# Altium PCB Posture_corrector_pcb_design.PcbDoc
Units mm, origin at the board's own origin, x right, y up, seen from the top; angles counter-clockwise.
Board outline 77.6 x 86.49 mm, 2 copper layers (Top Layer, Bottom Layer); 23 components, 19 nets, 91 pads, 3 vias.
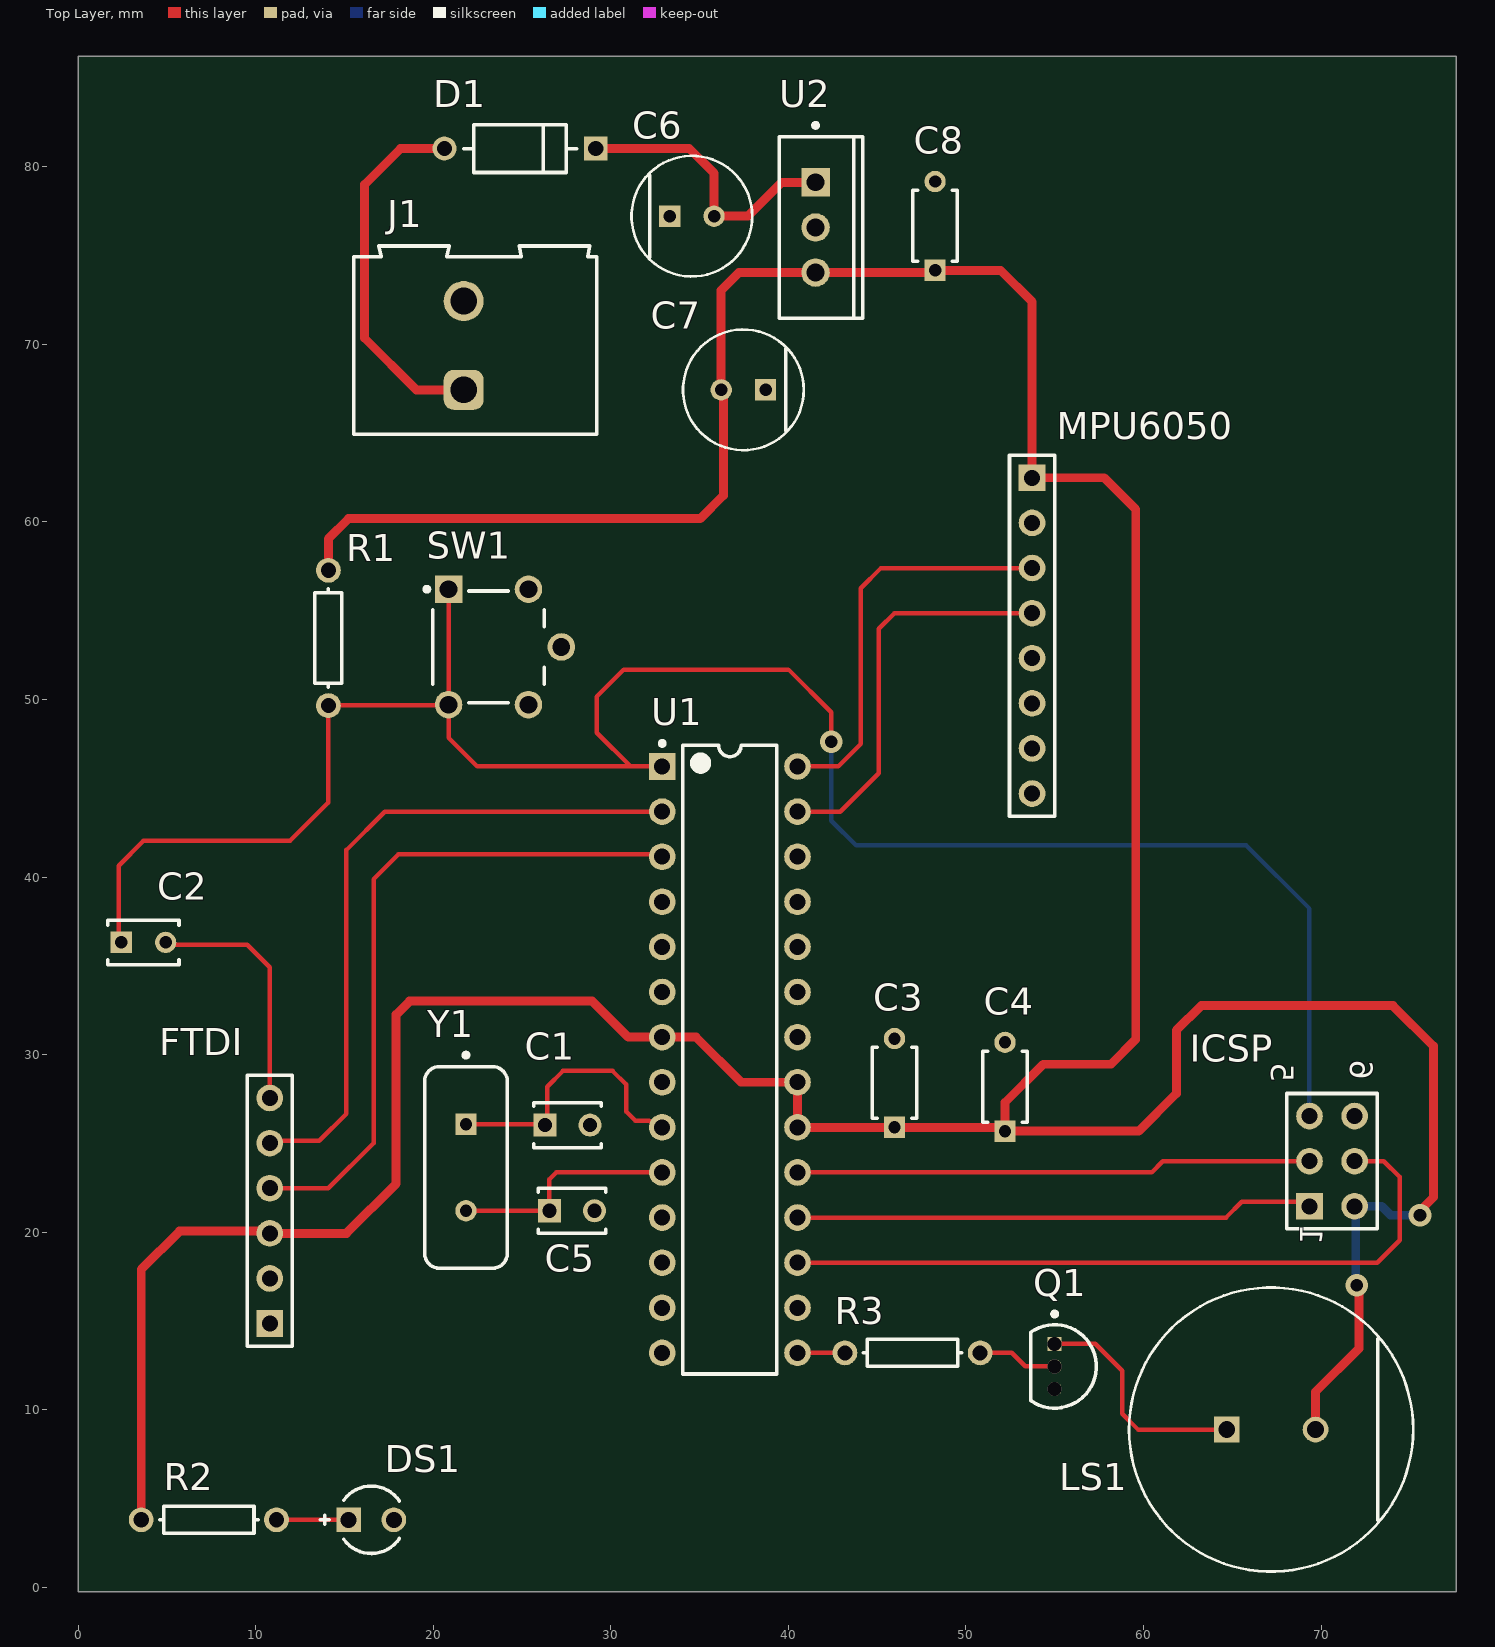
[diagram p0: Top Layer view]
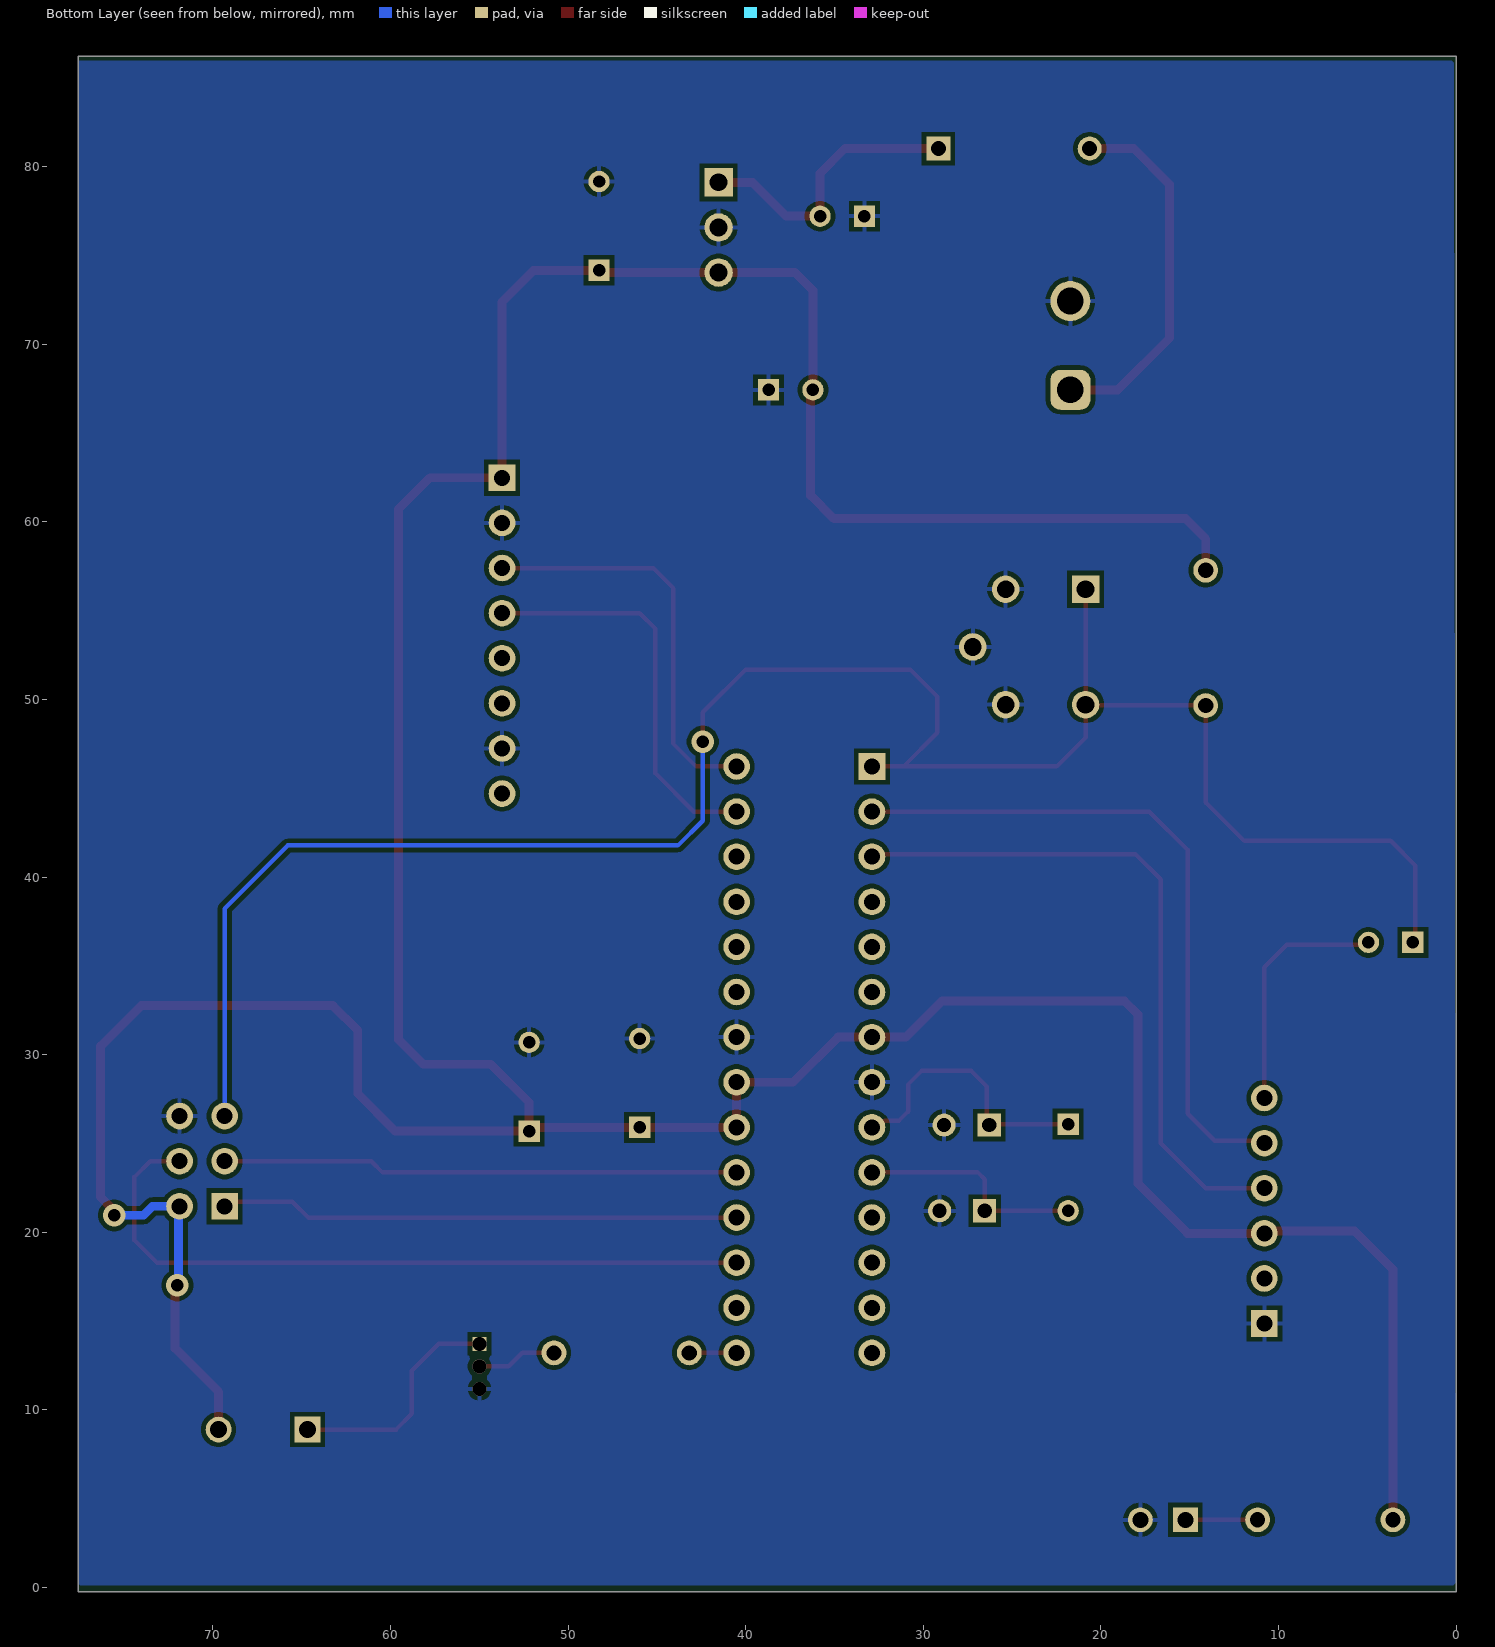
[diagram p1: Bottom Layer view, seen from below]

## Layer stack, top to bottom
Top Solder: solder mask 0.0102, Solder Resist, Dk 3.5
Top Layer: signal copper 0.0356
Dielectric 1: dielectric 0.32, FR-4, Dk 4.8
Bottom Layer: signal copper 0.0356
Bottom Solder: solder mask 0.0102, Solder Resist, Dk 3.5

## Board outline
0,-0.254 77.597,-0.254 77.597,86.233 0,86.233

## Design rules (kind name [scope] priority, off if disabled: settings)
Clearance [All] p1: gap=0.254 ignorepadtopadclearanceinfootprint=FALSE
PolygonConnect [All] p1: connectstyle=Relief reliefconductorwidth=0.254 reliefentries=4 polygonreliefangle="90 Angle" airgapwidth=0.254
RoutingVias [All] p1: holewidth=0.711 width=1.27 viastyle="Through Hole" minholewidth=0.711 minwidth=1.27 maxholewidth=0.711 maxwidth=1.27
SolderMaskExpansion [All] p1: expansion=0.102 istentingtop=FALSE
SupplyNets "Schematic Supply Nets_1" [InNet('GND')] p1: voltage=0.000
SupplyNets "Schematic Supply Nets" [InNet('VCC')] p2: voltage=0.000
Width [All] p1: maxlimit=1 minlimit=0.2 preferedwidth=0.254 minimp=50.000000 maximp=50.000000 favimp=50.000000
30 further rules are at their usual default settings.

## Components (designator, comment, footprint, x,y, rotation, side; value= is the part's Value field where it differs from the comment)
C1 "22pF" KEMT-C315-THT-2 27.559,26.035 r0 top
C2 "100nF" FP-RCE1A2-MFG 3.683,36.322 r0 top
C3 "100nF" FP-RCE1K1-2_5-MFG 45.974,28.408 r90 top
C4 "100nF" FP-RCE1K1-2_5-MFG 52.197,28.194 r90 top
C5 "22pF" KEMT-C315-THT-2 27.813,21.209 r0 top
C6 "100uF" FP-RAD-TH-D_6_3_0_5-L_11-MFG 34.564,77.216 r0 top
C7 "100uF" FP-RAD-TH-D_6_3_0_5-L_11-MFG 37.465,67.437 r180 top
C8 "100nF" FP-RCE1K1-2_5-MFG 48.26,76.668 r90 top
D1 "1N4007" FP-1N4007E-E3-54-MFG 24.892,81.026 r180 top
DS1 "LTL-1CHE" INDPR60-254-520X380X650 16.51,3.81 r0 top
FTDI "Header 6" HDR1X6 10.795,14.859 r90 top
ICSP "Header 3X2" HDR2X3 69.342,21.463 r90 top
J1 "9V" 691211720002 22.367,69.937 r90 top
LS1 "SDC1610M5-01" FP-SDC1610M5-01-MFG 67.183,8.89 r0 top
MPU6050 "Header 8" HDR1X8 53.721,62.484 r270 top
Q1 "BC547B" ONSC-TO-92-3-29-11 54.991,12.446 r270 top
R1 "" AXIAL-0.3 14.097,53.467 r90 top value=10k
R2 "" AXIAL-0.3 7.366,3.81 r180 top value=330E
R3 "" AXIAL-0.3 46.99,13.208 r0 top value=1k
SW1 "EVQ-PBG04M" FP-EVQ-PBG04M-MFG 23.114,52.959 r0 top
U1 "ATmega328P-PU" 28P3 36.703,29.718 r0 top
U2 "LM7805CT" FAIR-TO-220-3 41.529,76.581 r0 top
Y1 "16MHz" FOX-FOXSLF160-20 21.844,23.649 r270 top

## Footprints (in the part's own frame and the unit in brackets; to place one, negate y for a bottom-side part, rotate by r counter-clockwise, add the part's x,y. Pads: shape width x height; smd on the part's side, far side on the other; paste and mask are expansions set on the pad)
28P3 [mm] "28-Pin Plastic Dual In-Line Package (PDIP)"
  rect 1.5x1.5 hole 0.9: 1(-3.81,16.51)
  round 1.5 hole 0.9: 2(-3.81,13.97) 3(-3.81,11.43) 4(-3.81,8.89) 5(-3.81,6.35) 6(-3.81,3.81) 7(-3.81,1.27) 8(-3.81,-1.27) 9(-3.81,-3.81) 10(-3.81,-6.35) 11(-3.81,-8.89) 12(-3.81,-11.43) 13(-3.81,-13.97) 14(-3.81,-16.51) 15(3.81,-16.51) 16(3.81,-13.97) 17(3.81,-11.43) 18(3.81,-8.89) 19(3.81,-6.35) 20(3.81,-3.81) 21(3.81,-1.27) 22(3.81,1.27) 23(3.81,3.81) 24(3.81,6.35) 25(3.81,8.89) 26(3.81,11.43) 27(3.81,13.97) 28(3.81,16.51)
  silkscreen extent -3.93,-17.7 2.65,17.93, body extent -3.6,-17.65 3.6,17.65, height 4.58
691211720002 [mm] "5,00mm - modular - green -45¡ã entry with rising cage clamp - 02p"
  rrect50% 2.25x2.25 hole 1.5: 1(-2.5,0.65)
  round 2.25 hole 1.5: 2(2.5,0.65)
  silkscreen extent -5,-6.85 5.6,6.85, body extent -5,-6.85 5.6,6.85, height 15.72
AXIAL-0.3 [mm] "Axial Device, Thru-Hole; 2 Leads; 0.3 in Pin Spacing"
  round 1.4 hole 0.85: 1(-3.81,0) 2(3.81,0)
  silkscreen extent -2.77,-0.76 2.77,0.76
FAIR-TO-220-3 [mm] "FM, 3-Leads, Body 10.2x4.7mm, Pitch 2.54mm"
  rect 1.6x1.6 hole 1: 1(0,2.54)
  round 1.6 hole 1: 2(0,0) 3(0,-2.54)
  silkscreen extent -2.04,-5.1 2.66,5.87, body extent -2.04,-5.1 2.66,5.1, height 18.95
FOX-FOXSLF160-20 [mm] "THD, 2-Leads, Body 11.35x4.65mm"
  rect 1.2x1.2 hole 0.7: 1(-2.44,0)
  round 1.2 hole 0.7: 2(2.44,0)
  silkscreen extent -6.45,-2.32 5.68,2.32, body extent -5.67,-2.32 5.68,2.33, height 3.6
FP-1N4007E-E3-54-MFG [mm]
  rect 1.35x1.35 hole 0.85 paste-2539.97 mask+0: 1(-4.26,0)
  round 1.35 hole 0.85 paste-2539.97 mask+0: 2(4.26,0)
  silkscreen extent -3.18,-1.35 3.18,1.35, body extent -5.03,-1.45 5.03,1.45, height 0.25
FP-EVQ-PBG04M-MFG [mm]
  round 1.55 hole 1 paste-2539.97 mask+0: 1(4.1,0) A'(-2.25,-3.25) B(2.25,3.25) B'(2.25,-3.25)
  rect 1.55x1.55 hole 1 paste-2539.97 mask+0: A(-2.25,3.25)
  silkscreen extent -3.6,-3.15 3.15,3.37, body extent -3.25,-4.13 4.97,4.13, height 0.25
FP-RAD-TH-D_6_3_0_5-L_11-MFG [mm]
  rect 1.2x1.2 hole 0.7 paste-2539.97 mask+0: 1(-1.25,0)
  round 1.2 hole 0.7 paste-2539.97 mask+0: 2(1.25,0)
  silkscreen extent -3.4,-3.4 3.4,3.4, body extent -3.5,-3.5 3.5,3.5, height 0.25
FP-RCE1A2-MFG [mm]
  rect 1.2x1.2 hole 0.7 paste-2539.97 mask+0: 1(-1.25,0)
  round 1.2 hole 0.7 paste-2539.97 mask+0: 2(1.25,0)
  silkscreen extent -2,-1.25 2,1.25, body extent -2.1,-1.35 2.1,1.35, height 0.25
FP-RCE1K1-2_5-MFG [mm]
  rect 1.2x1.2 hole 0.7 paste-2539.97 mask+0: 1(-2.5,0)
  round 1.2 hole 0.7 paste-2539.97 mask+0: 2(2.5,0)
  silkscreen extent -2,-1.25 2,1.25, body extent -3.2,-1.35 3.2,1.35, height 0.25
FP-SDC1610M5-01-MFG [mm]
  rect 1.45x1.45 hole 0.95 paste-2539.97 mask+0: 1(-2.5,0)
  round 1.45 hole 0.95 paste-2539.97 mask+0: 2(2.5,0)
  silkscreen extent -8,-8 8,8, body extent -8.1,-8.1 8.1,8.1, height 0.25
HDR1X6 [mm] "Connector; Header; 6 Position"
  rect 1.5x1.5 hole 0.9: 1(0,0)
  round 1.5 hole 0.9: 2(2.54,0) 3(5.08,0) 4(7.62,0) 5(10.16,0) 6(12.7,0)
  silkscreen extent -1.27,-1.27 13.97,1.27
HDR1X8 [mm] "Connector; Header; 8 Position"
  rect 1.5x1.5 hole 0.9: 1(0,0)
  round 1.5 hole 0.9: 2(2.54,0) 3(5.08,0) 4(7.62,0) 5(10.16,0) 6(12.7,0) 7(15.24,0) 8(17.78,0)
  silkscreen extent -1.27,-1.27 19.05,1.27
HDR2X3 [mm] "Connector; Header; 3x2 Position"
  rect 1.5x1.5 hole 0.9: 1(0,0)
  round 1.5 hole 0.9: 2(0,-2.54) 3(2.54,0) 4(2.54,-2.54) 5(5.08,0) 6(5.08,-2.54)
  silkscreen extent -1.27,-3.81 6.35,1.27
INDPR60-254-520X380X650 [mm] "THD, 2-Leads, Dia 3.8mm, Pitch 2.54mm"
  rect 1.4x1.4 hole 0.9: 1(-1.27,0)
  round 1.4 hole 0.9: 2(1.27,0)
  silkscreen extent -2.87,-1.9 1.58,1.9, body extent -1.9,-1.9 1.9,1.9, height 6.5
KEMT-C315-THT-2 [mm] "THD, 2-Leads, Body 3.81x2.54mm"
  rect 1.3x1.3 hole 0.8: 1(-1.27,0)
  round 1.3 hole 0.8: 2(1.27,0)
  silkscreen extent -1.91,-1.27 1.91,1.27, body extent -1.91,-1.27 1.91,1.27, height 4.66
ONSC-TO-92-3-29-11 [mm] "TO, 3-Leads, Body Dia 4.7mm, Pitch 1.27mm"
  rect 0.8x0.8 hole 0.8: 1(-1.27,0)
  round 0.8 hole 0.8: 2(0,0) 3(1.27,0)
  silkscreen extent -3.07,-1.34 2.35,2.35, body extent -2.35,-1.33 2.36,2.36, height 7.87

## Part data
C1 C5: library part CMP-1664-00008-1, "Capacitor, Ceramic, 22 pF, +/-10 %, 100 V, -55 to 125 degC, 2-Pin THD, RoHS, Bulk", Case\Package=TO-220, Max Input Voltage="40 V", Max Operating Temperature="125 degC", Max Ouput Current="1.5 A", Min Input Voltage="4.2 V", Min Operating Temperature="0 degC", Output Voltage="1.2 V", Package Quantity=50, ComponentLink1Description="Manufacturer URL", ComponentLink1URL=http://www.kemet.com/, ComponentLink2Description=Datasheet, ComponentLink2URL=http://capacitoredge.kemet.com/capedge2/DataSheet/Datasheet-C315C220K1G5TA.pdf?pn=C315C220K1G5TA{BULK}, DatasheetVersion=Aug-16, Height="9.28 mm", Length="10.28 mm", Mount="Through Hole", Output Current="1.5 A", Outputs=1, PackageDescription="2-Pin Through Hole Device, Body 3.81 x 2.54 mm", PackageReference=C315-THT-2, Packaging=Rail/Tube, Pins=3, Radiation Hardening=No, REACH SVHC="No SVHC", RoHSCompliant=true, Weight="0.08113 oz", Width="4.82 mm"
C2: library part CMP-06035-052488-1, "Cap Ceramic 100nF 100V X7R ±10% Radial 2.5mm +125°C Automotive Ammo Pack", Case/Package=Radial, Dielectric=X7R, Max Operating Temperature=125°C, Min Operating Temperature=-55°C, Package Quantity=2000, Ratings=AEC-Q200, Resistor Type=Ceramic, Tolerance=10%, Voltage Rating=100V, Capacitance=100nF, Height=3.5mm, Height - Seated (Max)=0.138inch, Lead Diameter=0.5mm, Lead Free="Lead Free", Lead Pitch=0.098inch, Lead/Base Style=Straight, Length=0.157inch, Mount="Through Hole", Packaging="Tape and Reel", Termination=Radial, Voltage Rating (DC)=100V, Width=0.098inch
C3 C4 C8: library part CMP-06035-011084-1, "Cap Ceramic Monolithic 100nF 100V 10% Thru-Hole Bulk", Case/Package=Radial, Dielectric=X7R, Max Operating Temperature=125°C, Min Operating Temperature=-55°C, Package Quantity=500, Ratings=AEC-Q200, Resistor Type=Ceramic, Tolerance=10%, Voltage Rating=100V, Capacitance=100nF, Height=3.5mm, Height - Seated (Max)=0.138inch, Lead Diameter=0.5mm, Lead Pitch=0.197inch, Lead/Base Style="Formed Leads", Length=0.157inch, Mount="Through Hole", Packaging=Bulk, Termination=Radial, Voltage Rating (DC)=100V, Width=0.098inch
C6 C7: library part CMP-05427-000779-1, "Aluminum Electrolytic Capacitors (Radial Lead Type) 2.2uF ±20% 250V", Capacitance=2.2uF, Case/Package=Radial, Max Operating Temperature=105°C, Min Operating Temperature=-25°C, Package Quantity=2000, Ripple Current=29mA, Tolerance=20%, Voltage Rating=250V, Diameter=6.3mm, Height=11.2mm, Height - Seated (Max)=0.48inch, Lead Diameter=0.5mm, Lead Pitch=2.5mm, Lead/Base Style=Straight, Length=11.2mm, Life (Hours)=2000Hour, Mount="Through Hole", Packaging="Ammo Pack", Radiation Hardening=No, Series=NHG, Termination=Radial, Voltage Rating (DC)=250V
D1: library part CMP-02540-000087-1, "DIODE GEN PURP 1KV 1A DO204AL", Average Rectified Current=1A, Case/Package=DO-41, Forward Voltage=1.1V, Max Operating Temperature=150°C, Max Repetitive Reverse Voltage (Vrrm)=1kV, Max Reverse Current=5uA, Max Surge Current=45A, Min Operating Temperature=-50°C, Package Quantity=5500, Contact Plating=Tin, Element Configuration=Single, Max Reverse Voltage (DC)=1kV, Mount="Through Hole", Number of Pins=2, Packaging="Tape and Reel", Peak Non-Repetitive Surge Current=45A, Radiation Hardening=No, Reverse Voltage=1kV, RoHS Compliant=Yes, Series=-
DS1: library part CMP-1674-00005-1, "Radial LED, 12.6 mcd, 20 mA, 2 V, -55 to 100 degC, 2-Pin THD, RoHS, Bulk", Case\Package=Radial, Current Rating="3.6 A", Max Operating Temperature="130 degC", Min Operating Temperature="-40 degC", Package Quantity=55, Resistance="0.045 Ohm", Tolerance=20%, ComponentLink1Description="Manufacturer URL", ComponentLink1URL=http://www.us.liteon.com/, ComponentLink2Description=Datasheet, ComponentLink2URL=https://datasheet.ciiva.com/15117/getdatasheetpartid-187746-15117985.pdf, DatasheetVersion=Dec-03, Height="1.1 inch", Lead Pitch="11.44 mm", Length="0.97 inch", Mount="Through Hole", PackageDescription="2-Pin Through Hole Device, Dia 3.8 mm, Pitch 2.54 mm", PackageReference=LTL-1CHE, Packaging=Tray, Radiation Hardening=No, RoHSCompliant=true, Shielding=Unshielded, Width="0.62 inch"
FTDI: "Header, 6-Pin", LatestRevisionDate=17-Jul-2002, LatestRevisionNote="Re-released for DXP Platform.", Publisher="Altium Limited"
ICSP: "Header, 3-Pin, Dual row", LatestRevisionDate=17-Jul-2002, LatestRevisionNote="Re-released for DXP Platform.", Publisher="Altium Limited"
J1: library part CMP-1502-02524-3, "211 Series 5MM Pitch Straight, Pcb Terminal Block, Through Hole, 2 Way", Color=Green, Current=10A, Max Operating Temperature=105°C, Min Operating Temperature=-40°C, Voltage=300V, Connector Type="PCB, Terminal Block", Contact Material=Brass, Contact Plating=Tin, Height=15.5mm, Housing Material=Nylon, Lead Pitch=5mm, Length=13.7mm, Mount="Through Hole", Number of Contacts=2, Number of Levels=1, Number of Pins=2, Number of Positions Per Level=2, Packaging=Box, Pitch=5.0038mm, Plating="Brass, Steel", REACH SVHC=Unknown, RoHS=Compliant, Stripping Length=-7mm, Termination=Screw, Width=10mm, Wire Gauge (Max)=24AWG, Wire Gauge (Min)=12AWG, Wire/Cable Gauge=12AWG
LS1: library part CMP-08413-000008-1, "AUDIO MAGNETIC INDICATOR 4-8V TH", Frequency=2.4kHz, Max Operating Temperature=70°C, Max Supply Current=30mA, Min Operating Temperature=-10°C, Nominal Supply Voltage (DC)=5V, Diameter=16mm, Height=10mm, Input Type=DC, Lead Free="Lead Free", Mount="Through Hole", Number of Pins=2, Number of Terminals/Pins=2, Operating Supply Current=30mA, Packaging=Tray, Sensing Method=Magnetic, Series=SDC, Termination="PC Pins", Voltage Rating=5V
MPU6050: "Header, 8-Pin", LatestRevisionDate=17-Jul-2002, LatestRevisionNote="Re-released for DXP Platform.", Publisher="Altium Limited"
Q1: library part CMP-1048-01467-1, "Amplifier Transistor, NPN Silicon, 3-Pin TO-92, Bulk Box", Manufacturer="On Semiconductor", ComponentLink1Description="Manufacturer URL", ComponentLink1URL=http://www.onsemi.com/, ComponentLink2Description=Datasheet, ComponentLink2URL=http://www.onsemi.com/pub_link/Collateral/BC546-D.PDF, ComponentLink3Description="Package Specification", ComponentLink3URL=http://www.onsemi.cn/pub_link/Collateral/2N6426-D.PDF, DatasheetVersion="Rev. 7", fT Min (MHz)=150, IC Continuous (A)=0.1, Mounting Technology="Through Hole", PackageDescription="3-Pin Transistor Outline, Body 4.825 x 3.685 mm, Pitch 1.27 mm", PackageReference=TO-92-3-29-11_AM_SL, PackageVersion="Rev. AM", Packing="Bulk Box", PartNumber=BC547B, Polarity=NPN, RoHS=FALSE
R1 R2 R3: library part Res1, "Resistor", LatestRevisionDate=17-Jul-2002, LatestRevisionNote="Re-released for DXP Platform.", PackageDescription="Axial Device, Thru-Hole; 2 Leads; 0.3 in Pin Spacing", PackageReference=AXIAL-0.3, Published=8-Jun-2000, Publisher="Altium Limited"
SW1: library part CMP-05618-000021-1, "SWITCH TACTILE SPST-NO 0.02A 15V", Actuator Color=White, Contact Current Rating=20mA, Contact Resistance=50mR, Max Operating Temperature=70°C, Max Voltage Rating (DC)=15V, Min Operating Temperature=-20°C, Operating Force=2.6N, Package Quantity=500, Actuator Length=0.4mm, Actuator Type=Standard, Current Rating=20mA, Electrical Life=50000Cycles, Illumination Type=Non-Illuminated, Lead Free="Lead Free", Mechanical Life=50000Cycles, Mount="Through Hole", Orientation=Straight, Packaging=Bulk, Radiation Hardening=No, RoHS Compliant=Yes, Series=EVQPB, Size=6mm, Switch Function=Off-Mom, Switch Travel=0.25mm, Termination="PC Pin", Throw Configuration=SPST, Voltage Rating (DC)=15V
U1: library part CMP-0095-00013-2, "8-bit AVR Microcontroller, 32KB Flash, 1KB EEPROM, 2KB SRAM, 28-pin PDIP, Industrial Grade (-40°C to 85°C)", ComponentLink1Description="Manufacturer URL", ComponentLink1URL=http://www.atmel.com/, ComponentLink2Description="ATmega48A/48PA/88A/88PA/168A/168PA/328/328P Datasheet", ComponentLink2URL=http://www.atmel.com/dyn/resources/prod_documents/8271.pdf, ComponentLink3Description="ATmega48A/48PA/88A/88PA/168A/168PA/328/328P Summary", ComponentLink3URL=http://www.atmel.com/dyn/resources/prod_documents/8271S.pdf, DatasheetVersion="revD, May-2011", PackageDescription="28-lead (0.300\"/7.62mm Wide) Plastic Dual Inline Package (PDIP)", PackageReference=28P3, PackageVersion="revB, Sep-2001", RevisionNote="DatasheetVersion updated. URLs added."
U2: library part CMP-2000-04938-1, "Positive Voltage Regulator, 5 V, 1 A, -40 to 125 degC, 3-Pin TO-220, RoHS, Tube", Manufacturer=FairchildSemiconductor, Maximum Input Voltage=35V, Maximum Output Current=2.2(Typ)A, Maximum Quiescent Current=8mA, Operating Temperature=-40to125degC, Output Voltage=5V, Package=3TO-220AB, Package Description="3-Pin Through Hole Device, Body 10 x 4.5 mm, Pitch 2.54 mm", Package Reference=TO-220, Typical Dropout Voltage @ Current=2@1AV, Accuracy=±4%, Category=LinearRegulator, Datasheet URL=https://datasheet.ciiva.com/26904/lm7805ct-26904988.pdf, Datasheet Version=Aug-12, Line Regulation=100mV, Load Regulation=100mV, Manufacturer URL=https://www.fairchildsemi.com/, Mounting=ThroughHole, Number of Outputs=1, Output Type=Fixed, Package URL=https://www.fairchildsemi.com/package-drawings/TO/TO220B03.pdf, Packaging=Rail/Tube, Polarity=Positive, Rad Hard=No, Type=Linear
Y1: library part CMP-1749-00003-1, "Resistance Weld Thru-Hole Crystal, 16 MHz, -20 to 70 degC, 2-Pin THD, RoHS, Bulk", Case\Package=Axial, Max Operating Temperature="155 degC", Min Operating Temperature="-55 degC", Package Quantity=200, Power Rating="250 mW", Resistance="221 kohm", Tolerance=1%, Voltage Rating="250 V", ComponentLink1Description="Manufacturer URL", ComponentLink1URL=http://www.foxonline.com/, ComponentLink2Description=Datasheet, ComponentLink2URL=http://www.foxonline.com/pdfs/hc49slf.pdf, DatasheetVersion=Mar-15, Length="0.248 inch", Mount="Through Hole", PackageDescription="2-Pin Through Hole Device, Body 11.35 x 4.65 mm", PackageReference=FOXSLF160-20, Packaging=Bulk, RoHSCompliant=true

## Via types
v1: diameter 1.27, hole 0.711, Top Layer to Bottom Layer, 3 vias

## Nets (pads, with @x,y where several pads share a name; then routed paths per layer and width w, separated by ;. In a path a pad name is that pad's centre, name@x,y a point inside that pad or via, vN(x,y) a via of type N, cw(c..) or ccw(c..) an arc to the next point about the centre after c; other vN are vias at no path point)
BASE: Q1.2 R3.2 | length 4.5
  Top Layer w0.254: R3.2 52.578,13.208 53.34,12.446 Q1.2
GND: C1.2 C3.2 C4.2 C5.2 C6.1 C7.1 C8.2 DS1.2 FTDI.1 ICSP.6 J1.2 MPU6050.2 MPU6050.7 Q1.3 SW1.1 SW1.B SW1.B' U1.8 U1.22 U2.2
MISO: ICSP.1 U1.18 | length 29.3
  Top Layer w0.254: U1.18 64.643,20.828 65.532,21.717 69.088,21.717 ICSP.1
MOSI: ICSP.4 U1.17 | length 40.9
  Top Layer w0.254: U1.17 73.152,18.288 74.422,19.558 74.422,23.114 73.533,24.003 ICSP.4
NetC1_1: C1.1 U1.9 Y1.1 | length 15.7
  Top Layer w0.254: Y1.1 26.235,26.089 C1.1 26.416,26.162 26.416,28.194 27.305,29.083 30.099,29.083 30.861,28.321 30.861,26.797 31.369,26.289 32.175,26.289 32.556,25.908 U1.9
NetC2_2: C2.2 FTDI.6 | length 13.8
  Top Layer w0.254: C2.2 5.06,36.195 9.525,36.195 10.795,34.925 FTDI.6
NetC5_1: C5.1 U1.10 Y1.2 | length 13
  Top Layer w0.254: Y1.2 C5.1 26.543,22.987 26.924,23.368 U1.10
NetC6_2: C6.2 D1.1 U2.1 | length 16.2
  Top Layer w0.5: D1.1 34.417,81.026 35.814,79.629 C6.2 37.719,77.216 39.624,79.121 U2.1
NetD1_2: D1.2 J1.1 | length 20.8
  Top Layer w0.5: D1.2 18.161,81.026 16.129,78.994 16.129,70.358 19.05,67.437 J1.1
NetDS1_1: DS1.1 R2.1 | length 4.1
  Top Layer w0.254: R2.1 DS1.1
NetLS1_1: LS1.1 Q1.1 | length 13.1
  Top Layer w0.254: Q1.1 57.277,13.716 58.801,12.192 58.801,9.779 59.69,8.89 LS1.1
NetR3_1: R3.1 U1.15 | length 2.7
  Top Layer w0.254: U1.15 R3.1
RESET: C2.1 ICSP.5 R1.1 SW1.A SW1.A' U1.1 | length 117.5
  Top Layer w0.254: C2.1 2.286,36.469 2.286,40.64 3.683,42.037 11.938,42.037 14.097,44.196 R1.1 14.123,49.683 20.838,49.683 SW1.A' ; SW1.A@20.685,56.388 SW1.A SW1.A' ; U1.1 31.115,46.228 ; v1(42.418,47.625) 42.418,49.276 40.005,51.689 30.734,51.689 29.21,50.165 29.21,48.133 31.115,46.228 ; SW1.A' 20.864,47.843 22.479,46.228 31.115,46.228
  Bottom Layer w0.254: v1(42.418,47.625) 42.418,43.18 43.815,41.783 65.786,41.783 69.342,38.227 ICSP.5
RX: FTDI.5 U1.2 | length 38.5
  Top Layer w0.254: FTDI.5 10.922,25.146 13.589,25.146 15.113,26.67 15.113,41.529 17.272,43.688 U1.2
SCK: ICSP.3 U1.19 | length 29.1
  Top Layer w0.254: U1.19 60.452,23.368 61.087,24.003 ICSP.3
SCL: MPU6050.3 U1.28 | length 23
  Top Layer w0.254: U1.28 42.799,46.228 44.069,47.498 44.069,56.261 45.212,57.404 MPU6050.3
SDA: MPU6050.4 U1.27 | length 22.6
  Top Layer w0.254: U1.27 42.926,43.688 45.085,45.847 45.085,53.975 45.974,54.864 MPU6050.4
TX: FTDI.4 U1.3 | length 38.6
  Top Layer w0.254: FTDI.4 14.097,22.479 16.637,25.019 16.637,39.878 18.034,41.275 32.766,41.275 U1.3
VCC: C3.1 C4.1 C7.2 C8.1 FTDI.3 ICSP.2 LS1.2 MPU6050.1 R1.2 R2.2 U1.7 U1.20 U1.21 U2.3 | length 248.9
  Top Layer w0.254: FTDI.3@10.668,20.066 FTDI.3 ; v1(72.009,17.018) v1@72.136,16.891
  Top Layer w0.5: R2.2 3.556,17.907 5.715,20.066 FTDI.3@10.668,20.066 ; FTDI.3 15.113,19.939 17.907,22.733 17.907,32.258 18.669,33.02 28.956,33.02 30.988,30.988 U1.7 34.798,30.988 37.338,28.448 U1.21 U1.20 C3.1 51.983,25.908 C4.1 ; R1.2 14.097,59.055 15.227,60.185 35.039,60.185 36.344,61.49 36.344,67.308 C7.2 36.215,73.045 37.211,74.041 U2.3 48.133,74.041 C8.1 51.943,74.168 53.721,72.39 MPU6050.1 57.785,62.484 59.563,60.706 59.563,30.861 58.166,29.464 54.356,29.464 52.197,27.305 C4.1 ; LS1.2 69.683,11.009 72.136,13.462 v1@72.136,16.891 ; v1(75.565,20.955) 75.565,21.209 76.327,21.971 76.327,30.48 74.041,32.766 63.246,32.766 61.849,31.369 61.849,27.813 59.73,25.694 C4.1
  Bottom Layer w0.254: ICSP.2 ICSP.2@71.945,21.399 ; v1@71.945,17.081 v1(72.009,17.018)
  Bottom Layer w0.5: ICSP.2 73.403,21.463 73.911,20.955 v1(75.565,20.955) ; v1@71.945,17.081 ICSP.2@71.945,21.399
pads on no net: FTDI.2 MPU6050.5 MPU6050.6 MPU6050.8 U1.4 U1.5 U1.6 U1.11 U1.12 U1.13 U1.14 U1.16 U1.23 U1.24 U1.25 U1.26

## Polygon pours and split planes (outlines as drawn)
GND on Bottom Layer "GND_L02_P001" (solid, pour order 1): 0.011,0.133 77.464,0.133 77.597,0.127 77.597,85.979 0.254,85.979 0.127,85.852

## Text inside footprints (layer, text, board x,y; h text height)
ICSP: Top Overlay "6" at 71.628,28.575 h1.27 r270; Top Overlay "5" at 67.183,28.448 h1.27 r270; Top Overlay "1" at 68.834,19.304 h1.27 r270